# Altium PCB moteur.PCBDOC
Units mil, origin at the board's own origin, x right, y up, seen from the top; angles counter-clockwise.
Board outline 11800 x 7870 mil, 2 copper layers (Top Layer, Bottom Layer); 13 components, 16 nets, 77 pads, 0 vias.
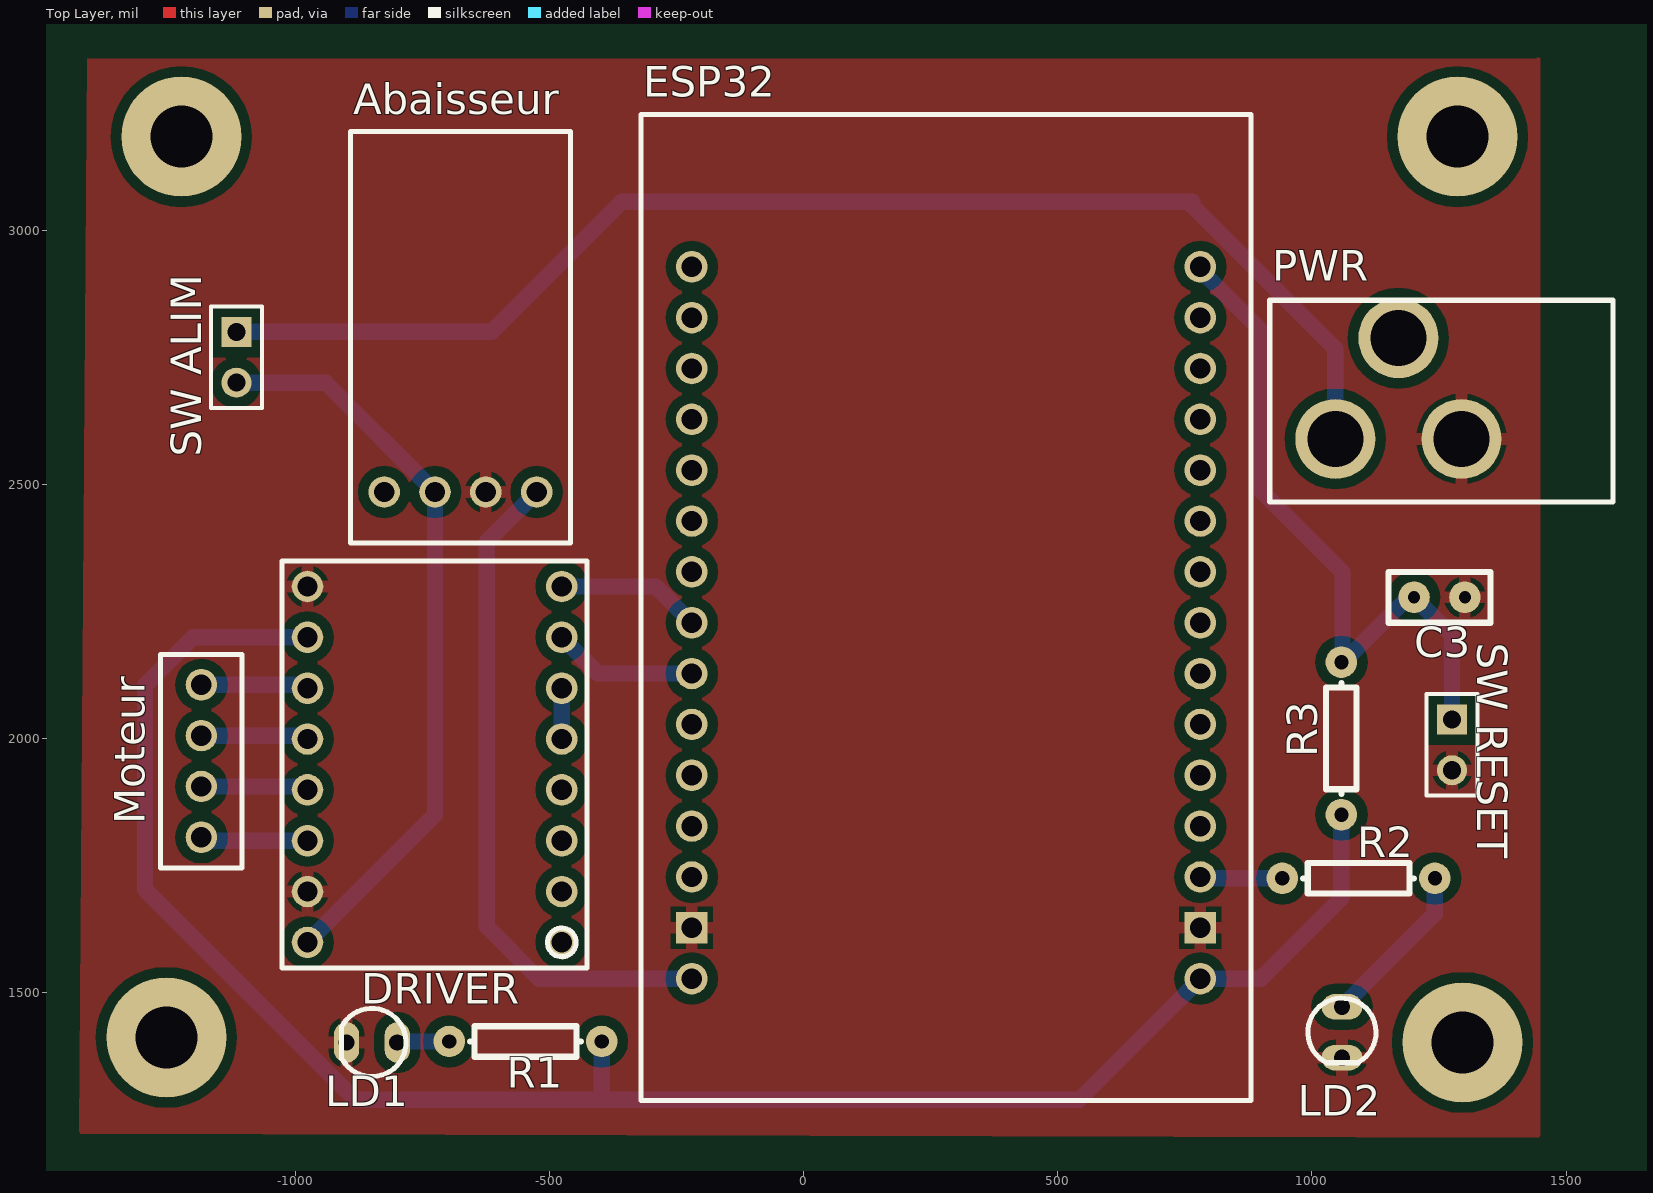
[diagram p0: Top Layer view]
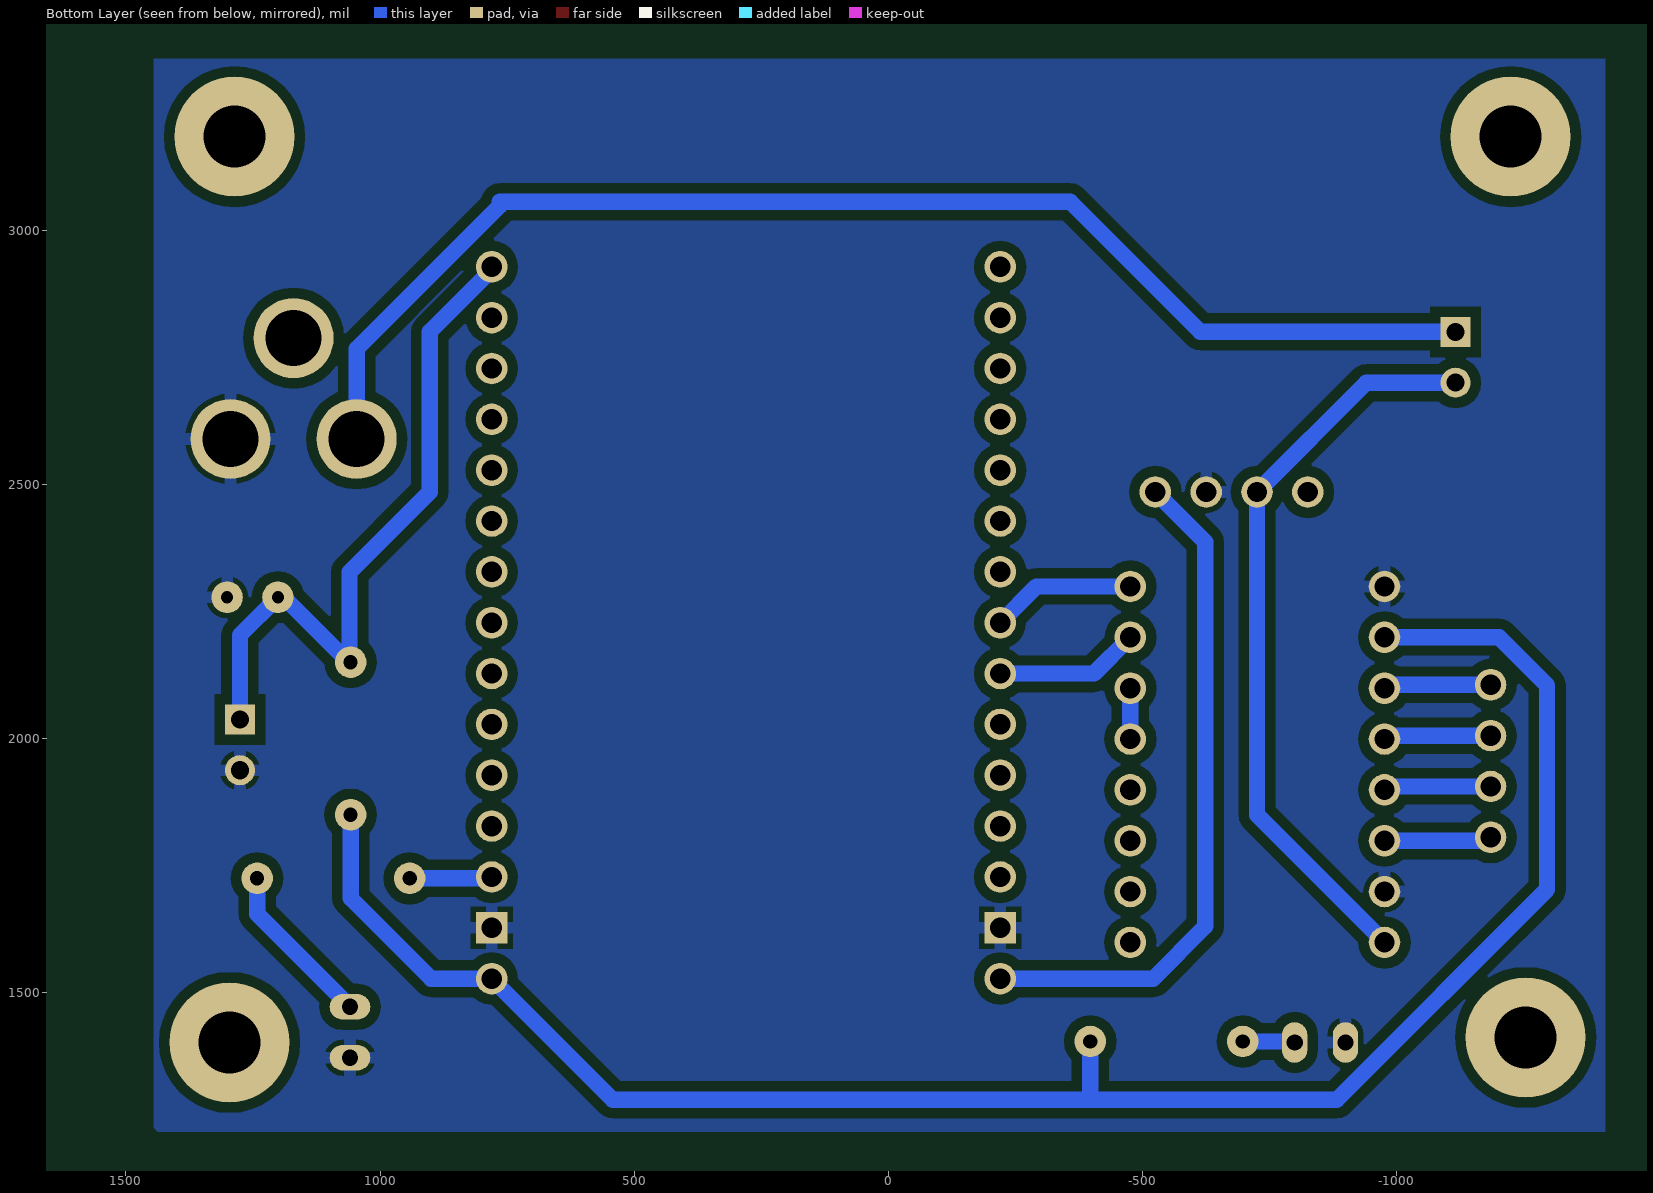
[diagram p1: Bottom Layer view, seen from below]

## Layer stack, top to bottom
Top Solder: solder mask 0.4, Solder Resist, Dk 3.5
Top Layer: signal copper 1.4
Dielectric1: dielectric 12.6, FR-4, Dk 4.8
Bottom Layer: signal copper 1.4
Bottom Solder: solder mask 0.4, Solder Resist, Dk 3.5

## Board outline
-5576.97,-1826.38 6223.03,-1826.38 6223.03,6043.62 -5576.97,6043.62

## Design rules (kind name [scope] priority, off if disabled: settings)
Clearance Clearance_bottom_polygon [OnLayer('Bottom Layer') Or OnLayer('Multi-Layer') vs OnLayer('Bottom Layer')  And  InPoly] p1: gap=20
Clearance Clearance_bottom_polygon_keepout [OnLayer('Bottom Layer') Or OnLayer('Multi-Layer') Or InPoly vs OnLayer('Keepout')] p2: gap=0
Clearance Clearance_top_polygon [OnLayer('Top Layer')  Or OnLayer('Multi-Layer') vs OnLayer('Top Layer') And InPoly] p3: gap=20
Clearance Clearance_bottom [OnLayer('Bottom Layer') Or OnLayer('Multi-Layer') vs OnLayer('Bottom Layer')  And Not InPoly] p4: gap=8
Clearance Clearance_top [OnLayer('Top Layer')  Or OnLayer('Multi-Layer') vs OnLayer('Top Layer') And Not InPoly] p5: gap=8
Clearance Clearance_pad_to_pad [OnLayer('Multi-Layer') vs OnLayer('Multi-Layer')] p6: gap=10
ComponentClearance ComponentClearance_bottom [OnLayer('Bottom Overlay') vs OnLayer('Bottom Overlay')] p1: gap=0 collisioncheckmode=3 verticalgap=10 showdistances=FALSE
ComponentClearance ComponentClearance_top [OnLayer('Top Overlay') vs OnLayer('Top Overlay')] p2: gap=0 collisioncheckmode=3 verticalgap=10 showdistances=FALSE
FabricationTestPointUsage TestPointUsage [All] p1: valid=0 allowmultiple=FALSE
FabricationTestpoint Testpoint [All] p1: side=3 testpointundercomponent=TRUE minsize=40 maxsize=100 preferedsize=60 minholesize=0 maxholesize=40 preferedholesize=32 testpointgrid=1 allowsidetop=TRUE allowsidebottom=TRUE usegrid=TRUE gridtolerance=0.01
HoleSize [All] p1: absolutevalues=TRUE maxlimit=1000 minlimit=16 maxpercent=80.000 minpercent=20.000
MinimumAnnularRing [PadXSize_AllLayers = PadYSize_AllLayers] p1: minimumring=10
PermittedLayers [All] p1: toplayerpermitted=TRUE bottomlayerpermitted=TRUE
PolygonConnect [All] p1: connectstyle=Relief reliefconductorwidth=24 reliefentries=4 polygonreliefangle="90 Angle" airgapwidth=10
RoutingVias [All] p1: holewidth=16 width=50 viastyle="Through Hole" minholewidth=16 minwidth=50 maxholewidth=1000 maxwidth=1000
SMDToPlane [All] p1: distance=0
SolderMaskExpansion [All] p1: expansion=4
ViasUnderSMD [All] p1: allowed=FALSE
Width Width_botom_top [OnLayer('Bottom Layer') or OnLayer('Top Layer')] p1: maxlimit=10000 minlimit=32 preferedwidth=32 minimp=50.000000 maximp=50.000000 favimp=50.000000
26 further rules are at their usual default settings.

## Components (designator, comment, footprint, x,y, rotation, side; value= is the part's Value field where it differs from the comment)
Abaisseur "Abaisseurtension" AbaisseurTension -524.66,2484.94 r270 top (schematic designator AbaisseurTension)
C3 "CAP" RAD0.1 1200.93,2277.86 r0 top
DRIVER "Driver" Driver -475.45,1599.12 r180 top
ESP32 "ESP32devKit" ESP32 -219.54,2927.86 r0 top (schematic designator U?)
LD1 "comment" LED3 -898.68,1402.27 r270 top
LD2 "comment" LED3 1059.2,1372.35 r0 top
Moteur "Moteur" Moteur -1184.11,1805.81 r180 top
PWR "Jack-Alim" "Connecteur Power" 922.19,2465.26 r0 top (schematic designator Jack)
R1 "RES" AXIAL0.3 -396.71,1402.27 r180 top
R2 "RES" AXIAL0.3 941.87,1727.07 r0 top
R3 "RES" AXIAL0.3 1059.98,2150.3 r270 top
"SW ALIM" "Header 2" HDR1X2 -1115.21,2799.91 r270 top (schematic designator P1)
"SW RESET" "Header 2" HDR1X2 1275.73,2037.7 r270 top (schematic designator P?)

## Footprints (in the part's own frame and the unit in brackets; to place one, negate y for a bottom-side part, rotate by r counter-clockwise, add the part's x,y. Pads: shape width x height; smd on the part's side, far side on the other; paste and mask are expansions set on the pad)
AbaisseurTension [mm]
  round 1.575 hole 1.016: 1(0,0) 2(0,-2.54) 3(0,-5.08) 4(0,-7.62)
  silkscreen extent -18,-9.3 2.54,1.7
AXIAL0.3 [mil]
  round 62 hole 28: 1(0,-2) 2(300,-2)
  silkscreen extent 41,-32 259,28
"Connecteur Power" [mm]
  round 4 hole 2.8: 0(3.15,3.15) 2(6.3,8.19) GND(9.45,3.15)
  silkscreen extent -0.13,0 17.01,10.08
Driver [mm]
  round 1.575 hole 1.016: 1(0,0) 2(0,-2.54) 3(0,-5.08) 4(0,-7.62) 5(0,-10.16) 6(0,-12.7) 7(0,-15.24) 8(0,-17.78) 9(12.7,-17.78) 10(12.7,-15.24) 11(12.7,-12.7) 12(12.7,-10.16) 13(12.7,-7.62) 14(12.7,-5.08) 15(12.7,-2.54) 16(12.7,0)
  silkscreen extent -1.27,-19.05 13.97,1.27
ESP32 [mm]
  round 1.575 hole 1.016: 0(0,0) 1(0,-2.54) 2(0,-5.08) 3(0,-7.62) 4(0,-10.16) 5(0,-12.7) 6(0,-15.24) 7(0,-17.78) 8(0,-20.32) 9(0,-22.86) 10(0,-25.4) 11(0,-27.94) 12(0,-30.48) 14(0,-35.56) 15(25.4,-35.56) 17(25.4,-30.48) 18(25.4,-27.94) 19(25.4,-25.4) 20(25.4,-22.86) 21(25.4,-20.32) 22(25.4,-17.78) 23(25.4,-15.24) 24(25.4,-12.7) 25(25.4,-10.16) 26(25.4,-7.62) 27(25.4,-5.08) 28(25.4,-2.54) 29(25.4,0)
  rect 1.575x1.575 hole 1.016: 13(0,-33.02) 16(25.4,-33.02)
  silkscreen extent -2.54,-41.66 27.94,7.62
HDR1X2 [mm] "Connector; Header; 2 Position"
  rect 1.5x1.5 hole 0.9: 1(0,0)
  round 1.5 hole 0.9: 2(2.54,0)
  silkscreen extent -1.27,-1.27 3.81,1.27
LED3 [mil] "3mm LED"
  oval 80x50 hole 32: A(0,100) K(0,0)
  silkscreen extent -67,-10 67,117
Moteur [mm]
  round 1.575 hole 1.016: 1(0,0) 2(0,-2.54) 3(0,-5.08) 4(0,-7.62)
  silkscreen extent -2.03,-9.14 2.03,1.52
RAD0.1 [mil]
  round 62 hole 24: 1(0,0) 2(100,0)
  silkscreen extent -50,-50 150,50

## Part data
C3: "capacité non polarisée"
DRIVER: "Driver A4988"
LD1 LD2: library part LED, "LED 5mm/3mm/CMS"
R1 R2 R3: "resistance"
"SW ALIM" "SW RESET": "Header, 2-Pin"

## Free pads (board coordinates)
  round 236.22 hole 122.05: 0(-1223.48,3183.76) 1(-1253.01,1412.11) 2(1286.36,3183.76) 2(1296.2,1402.27)

## Nets (pads, with @x,y where several pads share a name; then routed paths per layer and width w, separated by ;. In a path a pad name is that pad's centre, name@x,y a point inside that pad or via, vN(x,y) a via of type N, cw(c..) or ccw(c..) an arc to the next point about the centre after c; other vN are vias at no path point)
GND: "SW RESET.2" Abaisseur.2 C3.2 DRIVER.9 DRIVER.15 ESP32.13 ESP32.16 LD1.K LD2.K PWR.GND
NetAbaisseur_1: Abaisseur.1 ESP32.14 | length 1341.2
  Bottom Layer w32: Abaisseur.1 -623.09,2386.52 -623.09,1630.65 -520.3,1527.86 ESP32.14
NetAbaisseur_3: "SW ALIM.2" Abaisseur.3 DRIVER.16 | length 1469.3
  Bottom Layer w32: -1115.21,2699.91 -939.62,2699.91 Abaisseur.3 -724.66,1849.91 DRIVER.16
NetC3_1: "SW RESET.1" C3.1 ESP32.29 R3.1 | length 1345.7
  Bottom Layer w32: ESP32.29 780.46,2921.95 902.5,2799.91 902.5,2484.94 1059.98,2327.46 1059.98,2152.3 1061.98,2150.3 C3.1@1189.54,2277.86 ; C3.1 1275.73,2203.06 1275.73,2037.7
NetDRIVER_5: DRIVER.5 DRIVER.6 | length 100
  Bottom Layer w32: DRIVER.5 DRIVER.6
NetDRIVER_7: DRIVER.7 ESP32.8 | length 285.4
  Bottom Layer w32: DRIVER.7 -404.19,2127.86 ESP32.8
NetDRIVER_8: DRIVER.8 ESP32.7 | length 285.4
  Bottom Layer w32: DRIVER.8 -290.8,2299.12 ESP32.7
NetDRIVER_10: DRIVER.10 ESP32.15 R1.1 R3.2 | length 3728.1
  Bottom Layer w32: DRIVER.10 -1200.65,2199.12 -1295.13,2104.63 -1295.13,1703.06 -881.75,1289.67 -397.5,1289.67 ; R1.1 -396.71,1290.46 -397.5,1289.67 ; R3.2 1057.98,1686.09 899.75,1527.86 ESP32.15 542.27,1289.67 -397.5,1289.67
NetDRIVER_11: DRIVER.11 Moteur.4 | length 211.4
  Bottom Layer w32: Moteur.4 -982.14,2105.81 DRIVER.11
NetDRIVER_12: DRIVER.12 Moteur.3 | length 211.4
  Bottom Layer w32: Moteur.3 -982.14,2005.81 DRIVER.12
NetDRIVER_13: DRIVER.13 Moteur.2 | length 211.4
  Bottom Layer w32: Moteur.2 -982.14,1905.81 DRIVER.13
NetDRIVER_14: DRIVER.14 Moteur.1 | length 211.4
  Bottom Layer w32: Moteur.1 -1177.42,1799.12 DRIVER.14
NetESP32_17: ESP32.17 R2.1 | length 162.6
  Bottom Layer w32: ESP32.17 783.24,1725.07 R2.1
NetLD1_A: LD1.A R1.2 | length 102.8
  Bottom Layer w32: LD1.A -796.68,1404.27 R1.2
NetLD2_A: LD2.A R2.2 | length 328.4
  Bottom Layer w32: LD2.A 1241.87,1655.02 R2.2
NetPWR_0: "SW ALIM.1" PWR.0 | length 2569.1
  Bottom Layer w32: -1115.21,2799.91 -613.24,2799.91 -357.34,3055.81 764.71,3055.81 764.71,3047.94 1046.2,2766.44 PWR.0
pads on no net: Abaisseur.4 DRIVER.1 DRIVER.2 DRIVER.3 DRIVER.4 ESP32.0 ESP32.1 ESP32.2 ESP32.3 ESP32.4 ESP32.5 ESP32.6 ESP32.9 ESP32.10 ESP32.11 ESP32.12 ESP32.18 ESP32.19 ESP32.20 ESP32.21 ESP32.22 ESP32.23 ESP32.24 ESP32.25 ESP32.26 ESP32.27 ESP32.28 PWR.2

## Polygon pours and split planes (outlines as drawn)
GND on Bottom Layer "Top Layer-No Net" (solid, pour order 4): -1409.31,3336.91 1445.02,3336.91 1445.02,1234.55 1441.09,1230.61 1437.15,1226.68 -1409.31,1226.68
GND on Top Layer "Top Layer-No Net" (solid, pour order 6): -1408.81,3336.91 1441.09,3336.91 1448.96,3344.79 1448.96,1215.01 -1424.53,1222.91

## Keep-outs
Keep-Out Layer:
  rectangle: -5342.32,5857.88 5878.15,6054.73
  rectangle: 5878.15,-1622.43 6075,6054.73
  rectangle: -5342.32,-1819.28 6075,-1622.43
  rectangle: -5539.17,-1819.28 -5342.32,6054.73

## Silkscreen, mask and mechanical layers (free items; w line width, h text height)
Mechanical 1:
  lines w32: -1410.49,1226.68 -1410.49,3341.24 1443.84,3341.24 1443.84,3292.03 1443.84,1226.68 -1410.49,1226.68
Mechanical 32:
  text "Les bandes en violet delimitent la surface utilisable...." at -5030,6664 h200
  text "Mais vous n'etes pas obliges de tout utiliser!!" at -4330,6248 h200
  text "ATTENTION:" at 6521,5511 h200
  text "Par defaut, les pistes" at 6521,5101 h200
  text "ont 32mil de largeur" at 6516,4723 h200
  text "En cas de besoin, cette largeur" at 6527,4361 h200
  text "peut etre reduite jusqu'a 10 mil" at 6516,3953 h200
  text "Par defaut, les vias" at 6544,3254 h200
  text "ont un diam. de 50 mil" at 6538,2854 h200
  text "En cas de besoin, ce diam." at 6504,2378 h200
  text "peut etre reduit jusqu'a 36 mil" at 6528,1948 h200